# Altium PCB DCI_MB1137 - saved.PcbDoc
Units mil, origin at the board's own origin, x right, y up, seen from the top; angles counter-clockwise.
Board outline 6060 x 4005 mil, 6 copper layers (Top Layer, Top Internal, VDD, GND, Bottom Internal, Bottom Layer), stack 25.868 mil thick; 154 components, 203 nets, 605 pads, 40 vias.
Unrouted connection lines stored in the file: 364.
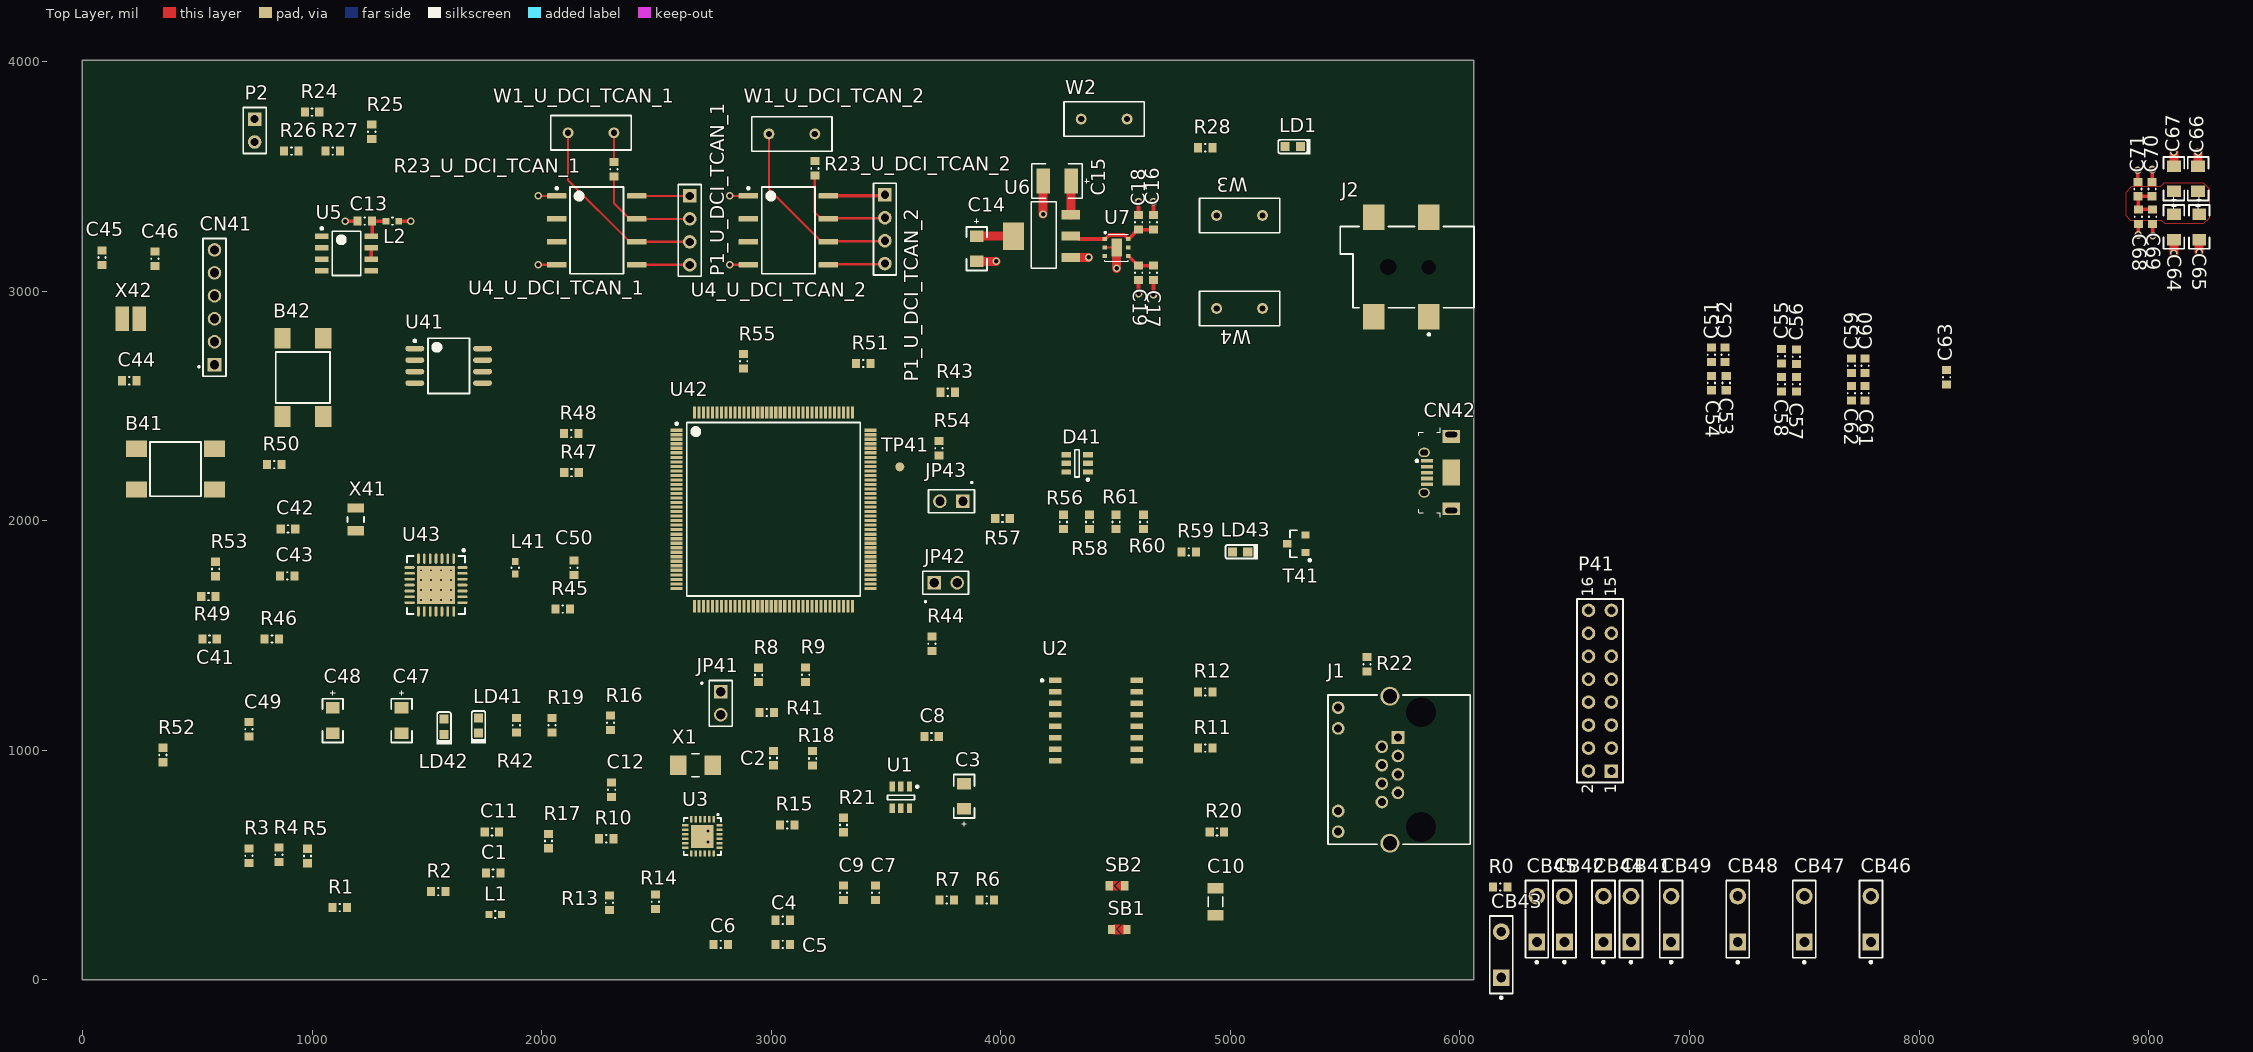
[diagram p0: Top Layer view]
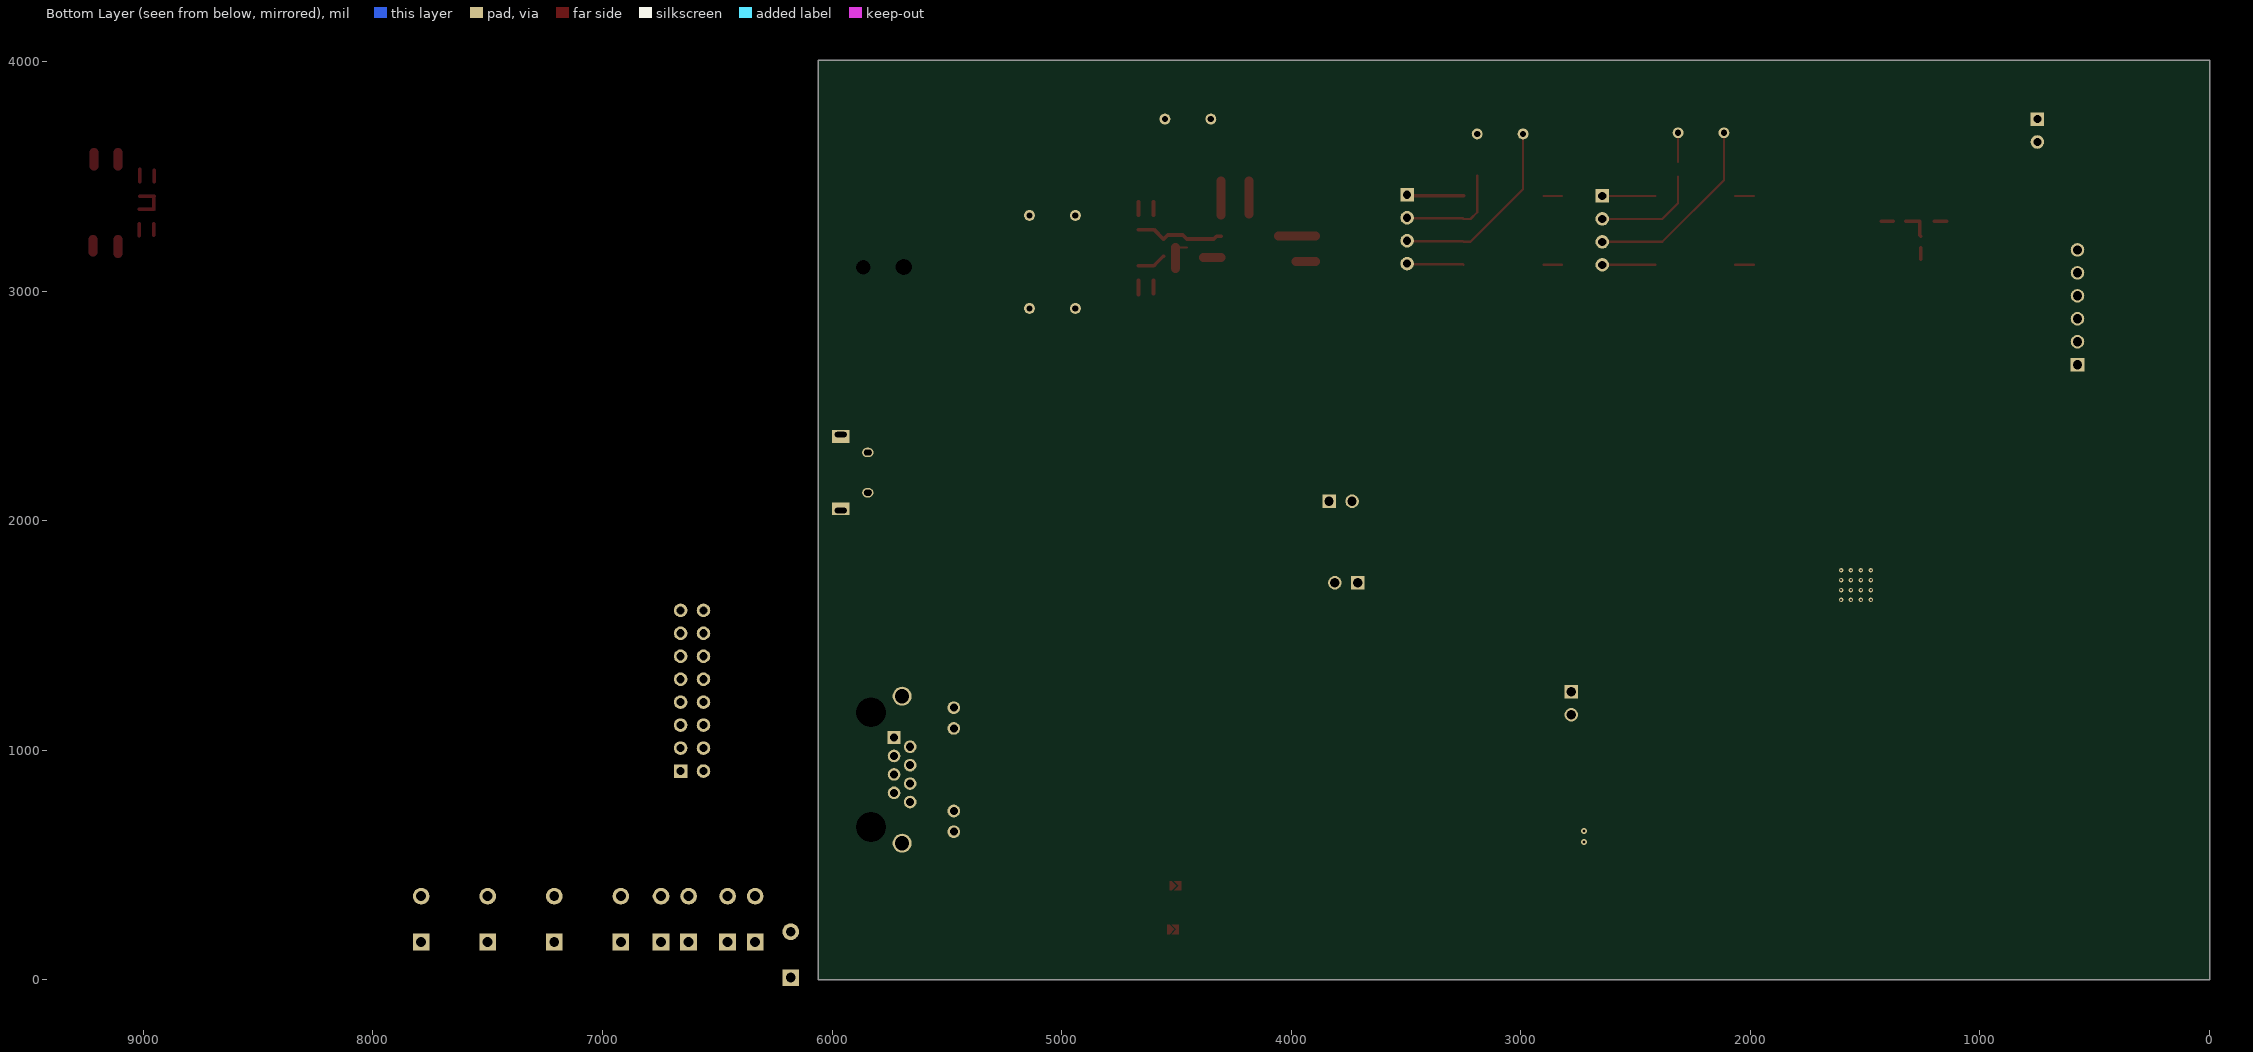
[diagram p1: Bottom Layer view, seen from below]
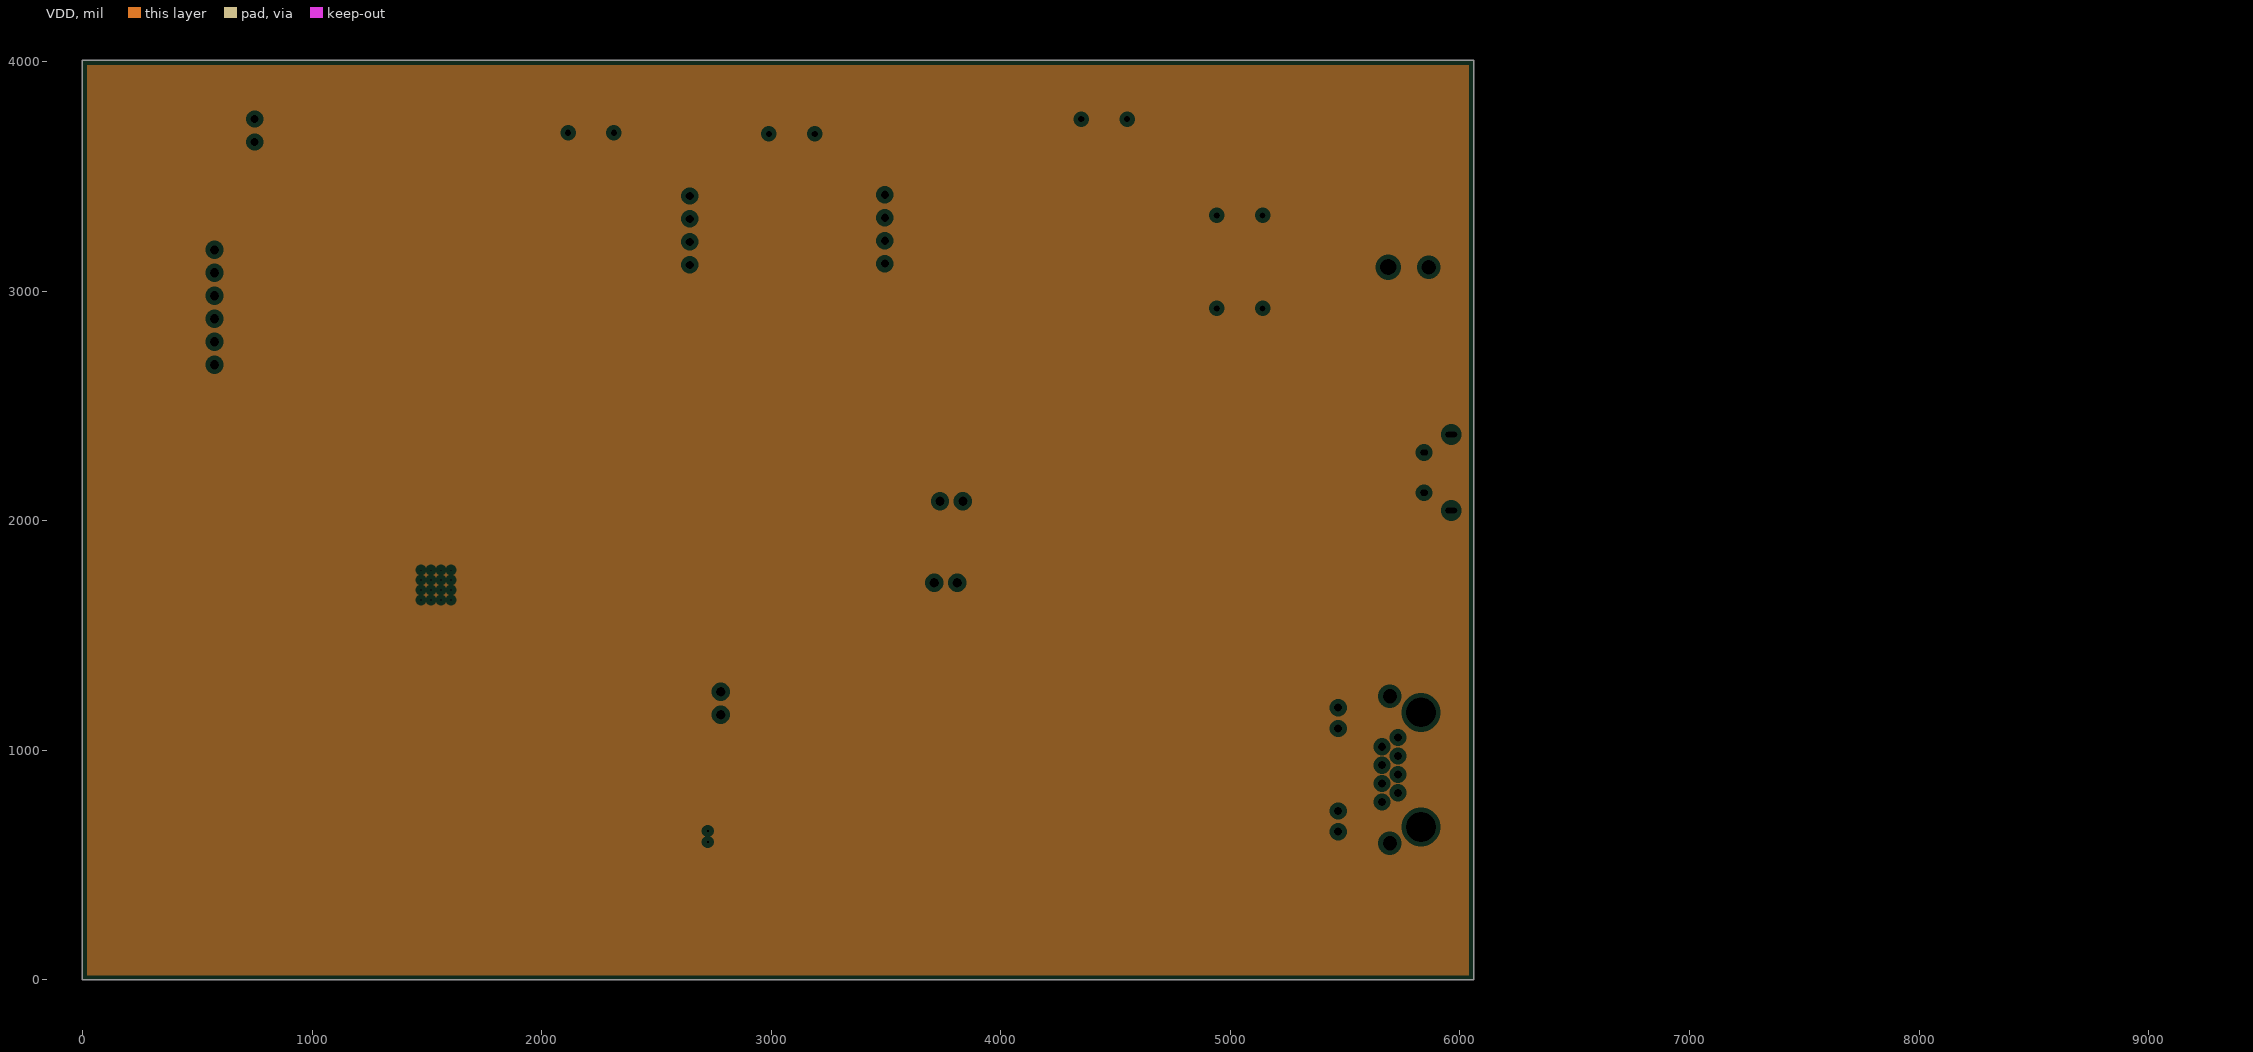
[diagram p2: VDD, clearances drawn from the general rule]
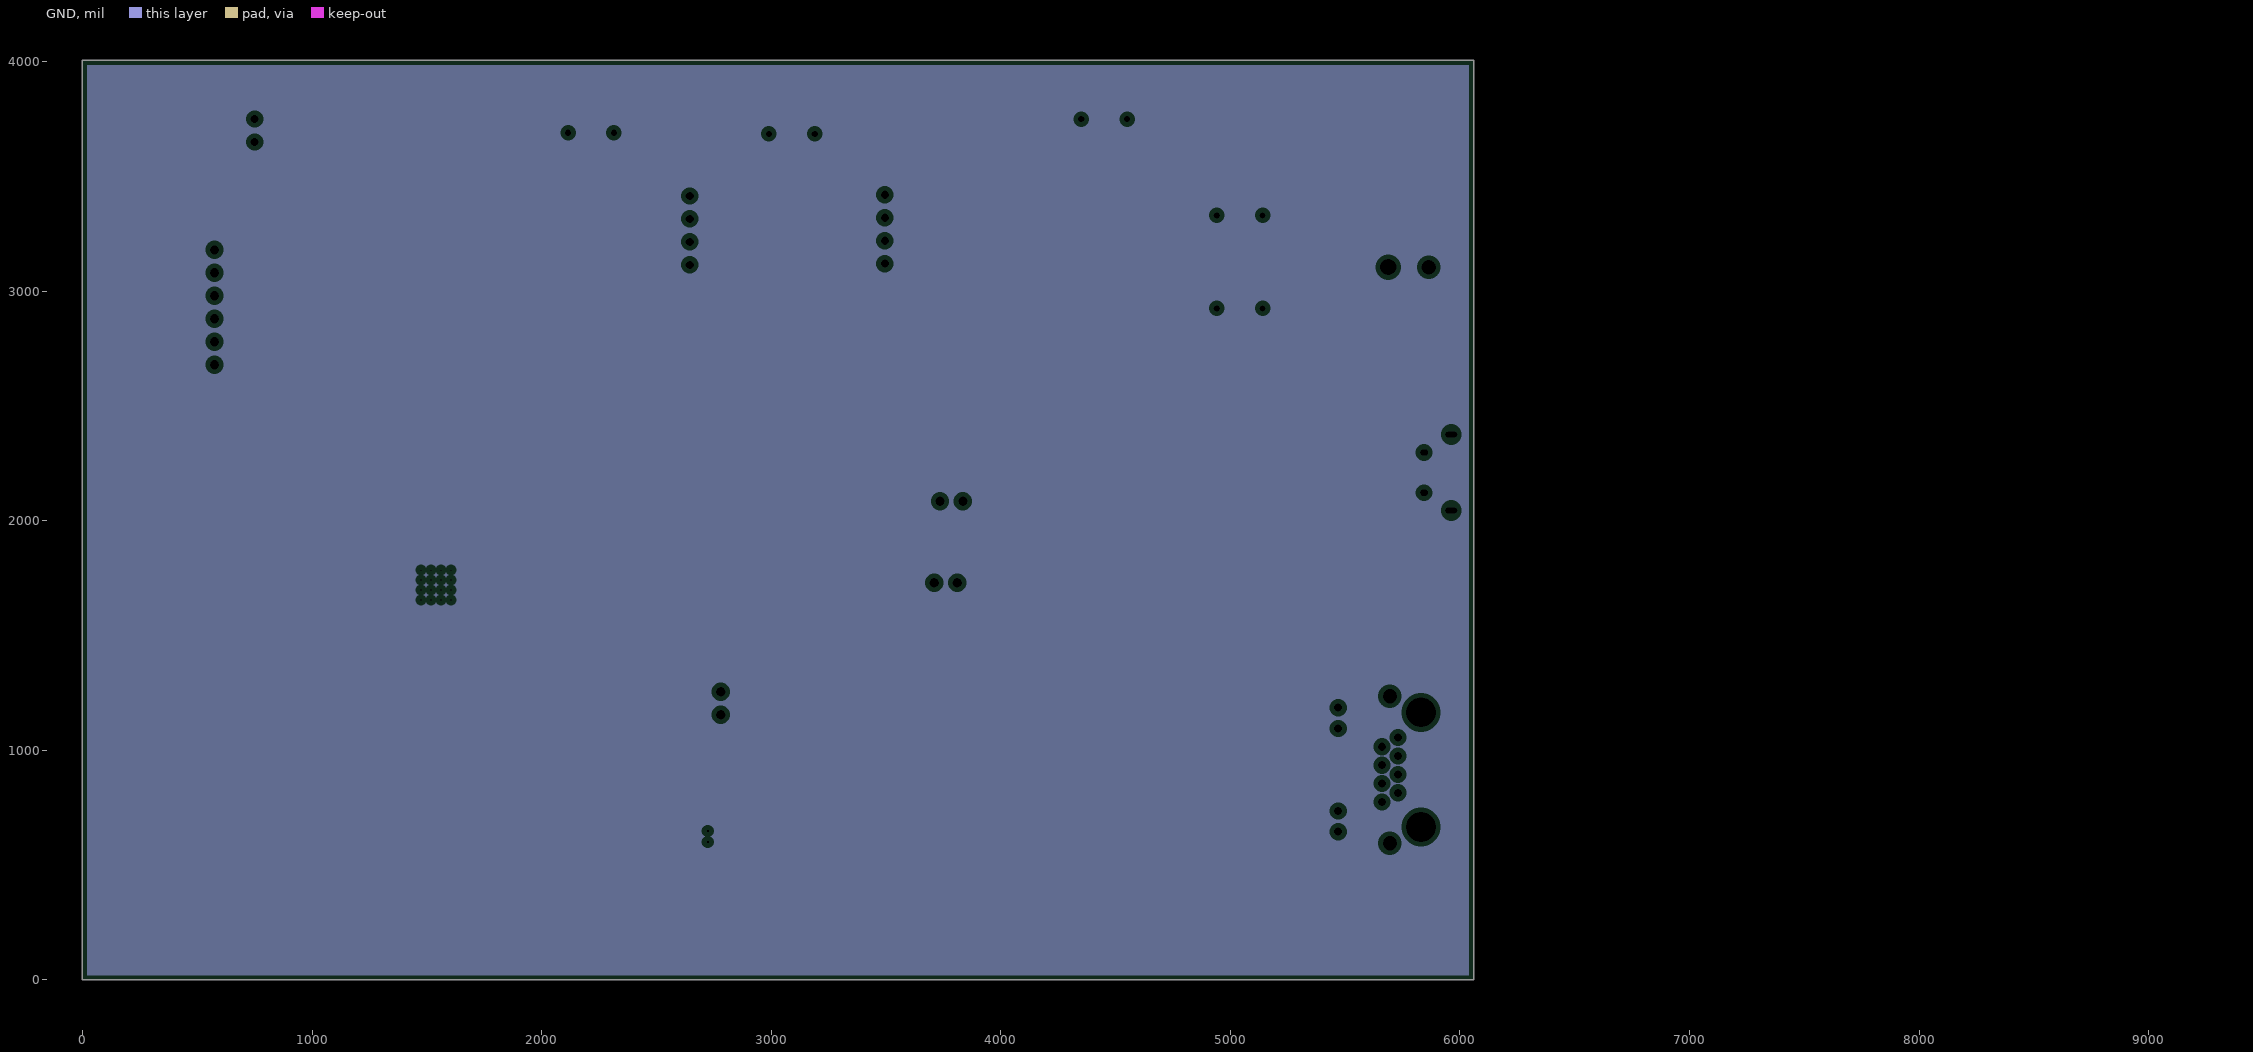
[diagram p3: GND, clearances drawn from the general rule]

## Layer stack, top to bottom
Top Solder: solder mask 1, SM-001, Dk 4
Top Layer: signal copper 1.378
Dielectric 1: prepreg 2, PP-001, Dk 3.9
Dielectric 2: prepreg 2, PP-001, Dk 3.9
Top Internal: signal copper 1.378
Dielectric 6: prepreg 2.8, PP-006, Dk 4.1
VDD: plane copper 1.378
Dielectric 3: core 4, Core-009, Dk 4.5
GND: plane copper 1.378
Dielectric 7: prepreg 2.8, PP-006, Dk 4.1
Bottom Internal: signal copper 1.378
Dielectric 4: prepreg 2, PP-001, Dk 3.9
Dielectric 5: prepreg 2, PP-001, Dk 3.9
Bottom Layer: signal copper 1.378
Bottom Solder: solder mask 1, SM-001, Dk 4

## Board outline
0,0 6060,0 6060,4005 0,4005

## Design rules (kind name [scope] priority, off if disabled: settings)
Clearance [All] p1: gap=7.87 ignorepadtopadclearanceinfootprint=FALSE
DiffPairsRouting [All] p1: maxlimit=10 minlimit=9.84 mostfreqgap=9.84 toplayer_maxgap=9.84 toplayer_minwidth=9.84 toplayer_maxwidth=9.84 toplayer_prefwidth=9.84 midlayer1_minwidth=9.84 midlayer1_maxwidth=9.84 midlayer1_prefwidth=9.84 midlayer2_minwidth=9.84 midlayer2_maxwidth=9.84 midlayer2_prefwidth=9.84 bottomlayer_maxgap=9.84 bottomlayer_minwidth=9.84 bottomlayer_maxwidth=9.84 bottomlayer_prefwidth=9.84 maxuncoupledlength=500
MatchedLengths "Schematic Matched Net Lengths_3" [InNet('RD_P')] p1: tolerance=100 checknetsindiffpair=TRUE checkdiffpairvsdiffpair=FALSE checkxsignals=FALSE checkothers=FALSE
MatchedLengths "Schematic Matched Net Lengths_2" [InNet('TD_P')] p2: tolerance=100 checknetsindiffpair=TRUE checkdiffpairvsdiffpair=FALSE checkxsignals=FALSE checkothers=FALSE
MatchedLengths "Schematic Matched Net Lengths_1" [InNet('RD_N')] p3: tolerance=100 checknetsindiffpair=TRUE checkdiffpairvsdiffpair=FALSE checkxsignals=FALSE checkothers=FALSE
MatchedLengths "Schematic Matched Net Lengths" [InNet('TD_N')] p4: tolerance=100 checknetsindiffpair=TRUE checkdiffpairvsdiffpair=FALSE checkxsignals=FALSE checkothers=FALSE
PlaneClearance [All] p1: clearance=20
PlaneConnect [All] p1: planeconnectstyle=Relief reliefexpansion=20 reliefentries=4 reliefconductorwidth=10 reliefairgap=10
PolygonConnect [All] p1: connectstyle=Relief reliefconductorwidth=10 reliefentries=4 polygonreliefangle="90 Angle" airgapwidth=10
RoomDefinition U_USB [InComponentClass('U_USB')] p1: confinementstyle=ConfineIn formatcopy=TRUE lockcomponents=FALSE outline -3420,-4435 -1420,-4435 -1420,-3435 -3420,-3435
RoomDefinition U_MCU_144 [InComponentClass('U_MCU_144')] p2: confinementstyle=ConfineIn formatcopy=TRUE lockcomponents=FALSE outline -3420,-4435 -1420,-4435 -1420,-3435 -3420,-3435
RoomDefinition U_Ethernet [InComponentClass('U_Ethernet')] p3: confinementstyle=ConfineIn formatcopy=TRUE lockcomponents=FALSE outline -3420,-4435 -1420,-4435 -1420,-3435 -3420,-3435
RoomDefinition U_DCI_TCAN_2 [InComponentClass('U_DCI_TCAN_2')] p4: confinementstyle=ConfineIn formatcopy=TRUE lockcomponents=FALSE outline -3420,-4435 -1420,-4435 -1420,-3435 -3420,-3435
RoomDefinition U_DCI_TCAN_1 [InComponentClass('U_DCI_TCAN_1')] p5: confinementstyle=ConfineIn formatcopy=TRUE lockcomponents=FALSE outline -3420,-4435 -1420,-4435 -1420,-3435 -3420,-3435
RoomDefinition U_DCI_MCU_Power [InComponentClass('U_DCI_MCU_Power')] p6: confinementstyle=ConfineIn formatcopy=TRUE lockcomponents=FALSE outline -3420,-4435 -1420,-4435 -1420,-3435 -3420,-3435
RoomDefinition U_DC1_ADC_Conditioning [InComponentClass('U_DC1_ADC_Conditioning')] p7: confinementstyle=ConfineIn formatcopy=TRUE lockcomponents=FALSE outline -3420,-4435 -1420,-4435 -1420,-3435 -3420,-3435
RoutingVias [All] p1: holewidth=19.68 width=33.07 viastyle="Through Hole" minholewidth=11.81 minwidth=25.2 maxholewidth=39.37 maxwidth=52.76
SolderMaskExpansion [All] p1: expansion=4 istentingtop=FALSE
Width Width_PWR [InNetClass('All Nets')] p1: maxlimit=39.37 minlimit=7.87 preferedwidth=15.75
Width [All] p2: maxlimit=23.62 minlimit=7.87 preferedwidth=15.75
Width Width_differential_pair [All] p3: maxlimit=35.43 minlimit=7.87 preferedwidth=23.62
27 further rules are at their usual default settings.

## Classes and differential pairs
net class PWR: +5V +12V GND PWR_JACK VDD
channel class DCI_TCAN: U_DCI_TCAN_1 U_DCI_TCAN_2
component class U_DCI_TCAN_2: P1_U_DCI_TCAN_2 R23_U_DCI_TCAN_2 U4_U_DCI_TCAN_2 W1_U_DCI_TCAN_2
component class U_DCI_TCAN_1: P1_U_DCI_TCAN_1 R23_U_DCI_TCAN_1 U4_U_DCI_TCAN_1 W1_U_DCI_TCAN_1
component class U_DCI_MCU_Power: C14 C15 C16 C17 C18 C19 J2 LD1 R28 U6 U7 W2 W3 W4
component class U_USB: C64 C65 C66 C67 C68 C69 C70 C71 CN42 D41 LD43 R56 R57 R58 R59 R60 R61 T41
component class U_MCU_144: B41 B42 C41 C42 C43 C44 C45 C46 C47 C48 C49 C50 C51 C52 C53 C54 C55 C56 C57 C58 C59 C60 C61 C62 C63 CB41 CB42 CB43 CB44 CB45 CB46 CB47 CB48 CB49 CN41 JP41 JP42 JP43 L41 LD41 LD42 P41 R0 R41 R42 R43 R44 R45 R46 R47 R48 R49 R50 R51 R52 R53 R54 R55 TP41 U41 U42 U43 X41 X42
component class U_Ethernet: C1 C2 C3 C4 C5 C6 C7 C8 C9 C10 C11 C12 J1 L1 R1 R2 R3 R4 R5 R6 R7 R8 R9 R10 R11 R12 R13 R14 R15 R16 R17 R18 R19 R20 R21 R22 SB1 SB2 U1 U2 U3 X1
component class U_DC1_ADC_Conditioning: C13 L2 P2 R24 R25 R26 R27 U5
differential pair CAN_U_DCI_TCAN_2: +CAN_U_DCI_TCAN_2_P -CAN_U_DCI_TCAN_2_N
differential pair CAN_U_DCI_TCAN_1: +CAN_U_DCI_TCAN_1_P -CAN_U_DCI_TCAN_1_N
differential pair USB_D: +USB_D_P -USB_D_N
differential pair TD: +TD_P -TD_N
differential pair RD: +RD_P -RD_N

## Components (designator, comment, footprint, x,y, rotation, side; value= is the part's Value field where it differs from the comment)
B41 "USER (Blue)" PB-6X6mm-Blue 405,2225 r180 top
B42 "TD-0341 [RESET/Black]" PB-6X6mm-Black 960,2625 r90 top
C1 "100nF" 0603C 1788.5,465 r0 top
C2 "30pF" 0603C 3010,966.5 r90 top value=100nF
C3 "10uF" TAN-A 3840,800 r270 top
C4 "470pF" 0603C 3050,260 r0 top value=100nF
C5 "1uF_X5R" 0603C 3050,155 r180 top value=1µF
C6 "100nF" 0603C 2780,155 r0 top
C7 "100nF" 0603C 3455,380 r270 top
C8 "100nF" 0603C 3698.5,1060 r0 top
C9 "100nF" 0603C 3315,380 r270 top
C10 "TC1206KKX7RDBB102" 1206C 4935,340.94 r270 top value=100nF
C11 "100nF" 0603C 1783.5,645 r0 top
C12 "30pF" 0603C 2305,828.5 r270 top value=100nF
C13 "100nF" 0603C 1230,3305 r180 top value=10nF
C14 "10uF" TAN-A 3895,3185 r90 top
C15 "10uF(25V)" TAN-B 4245,3480 r0 top value=10uF
C16 "1uF_X5R" 0603C 4665,3300 r90 top value=1µF
C17 "1uF_X5R" 0603C 4665,3080 r270 top value=1µF
C18 "100nF" 0603C 4600,3300 r270 top
C19 "100nF" 0603C 4600,3080 r90 top
C41 "[N/A]" 0603C 553.5,1485 r180 top value=100pF
C42 "2pF" 0603C 895,1965 r180 top
C43 "2pF" 0603C 891.5,1760 r180 top
C44 "4.3pF[N/A]" 0603C 203.5,2610 r0 top
C45 "4.3pF[N/A]" 0603C 85,3146.5 r90 top
C46 "100nF" 0603C 315,3141.5 r270 top value=100pF
C47 "2.2uF_X7R" TAN-A 1390,1130 r90 top value=2.2uF
C48 "2.2uF_X7R" TAN-A 1090,1130 r90 top value=2.2uF
C49 "1uF_X5R" 0603C 725,1091.5 r90 top value=1µF
C50 "100nF" 0603C 2140,1795 r90 top value=10nF
C51 "100nF" 0603C 7095,2723.5 r90 top value=10nF
C52 "100nF" 0603C 7155,2723.5 r90 top value=10nF
C53 "100nF" 0603C 7160,2600 r270 top value=10nF
C54 "100nF" 0603C 7095,2600 r270 top value=10nF
C55 "100nF" 0603C 7400,2716.5 r90 top value=10nF
C56 "100nF" 0603C 7465,2715 r90 top value=10nF
C57 "100nF" 0603C 7465,2595 r270 top value=10nF
C58 "100nF" 0603C 7400,2595 r270 top value=10nF
C59 "100nF" 0603C 7705,2675 r90 top value=10nF
C60 "100nF" 0603C 7765,2675 r90 top value=10nF
C61 "100nF" 0603C 7765,2555 r270 top value=10nF
C62 "100nF" 0603C 7705,2555 r270 top value=10nF
C63 "4.7uF_X5R_0603" 0603C 8120,2625 r90 top value=1µF
C64 "4.7uF" TAN-A 9110,3280 r90 top value=47uF
C65 "4.7uF" TAN-A 9220,3280 r90 top value=47uF
C66 "4.7uF" TAN-A 9215,3490 r270 top value=47uF
C67 "4.7uF" TAN-A 9110,3490 r270 top value=47uF
C68 "100nF" 0603C 8955,3325 r270 top value=10nF
C69 "100nF" 0603C 9017.24,3325 r270 top value=10nF
C70 "100nF" 0603C 9015,3445 r90 top value=10nF
C71 "100nF" 0603C 8952.76,3445 r90 top value=10nF
CB41 "Circuit Breaker" SPST-2 6745,265 r90 top
CB42 "Circuit Breaker" SPST-2 6455,265 r90 top
CB43 "Circuit Breaker" SPST-2 6180,110 r90 top
CB44 "Circuit Breaker" SPST-2 6625,265 r90 top
CB45 "Circuit Breaker" SPST-2 6335,265 r90 top
CB46 "Circuit Breaker" SPST-2 7790,265 r90 top
CB47 "Circuit Breaker" SPST-2 7500,265 r90 top
CB48 "Circuit Breaker" SPST-2 7210,265 r90 top
CB49 "Circuit Breaker" SPST-2 6920,265 r90 top
CN41 "SWD_Header" HDR_1x6_2R54_V_M 575,2680 r90 top
CN42 "475900001" MOLEX_47590001 5856.93,2210 r90 top
D41 "ESDA6V1BC6" SOT23-6L 4332.24,2250 r180 top
J1 "RJHSE-5381" AMPH-RJHSE-5381_V 5694.96,915.79 r90 top
J2 "Power_Connector" CUI-PJ-002AH-4_V 5770,3105 r180 top
JP41 "" HDR_1x2_2R54_V_M_S 2780,1255 r270 top
JP42 "" HDR_1x2_2R54_V_M_S 3710,1730 r0 top
JP43 "" HDR_1x2_2R54_V_M_S 3835,2085 r180 top
L1 "BEAD" 0603L 1797.5,285 r0 top value=100uH
L2 "BEAD" 0603L 1350,3305 r0 top value=100uH
L41 "BEAD" 0603L 1885,1795 r90 top value=100uH
LD1 "Green" 0603D-G 5271.53,3630 r180 top
LD41 "Blue" 0603D-B 1725,1108.47 r90 top
LD42 "Red" 0603D-R 1575,1103.47 r90 top
LD43 "Green" 0603D-G 5042.24,1865 r180 top
P1_U_DCI_TCAN_1 "CAN_Header" HDR1X4 2645,3415 r270 top (schematic designator P1)
P1_U_DCI_TCAN_2 "CAN_Header" HDR1X4 3495,3420 r270 top (schematic designator P1)
P2 "ADC_Header" HDR1X2 750,3750 r270 top
P41 "Header 8X2" HDR2X8 6660,910 r90 top
R0 "0" 0603R 6175,405 r0 top value=1K
R1 "50" 0603R 1120,315 r0 top
R2 "50" 0603R 1550,385 r0 top
R3 "10K" 0603R 725,541.5 r270 top
R4 "10K" 0603R 855,545 r270 top
R5 "10K" 0603R 980,540 r270 top
R6 "50" 0603R 3939,348.5 r180 top
R7 "50" 0603R 3764,348.5 r180 top
R8 "33" 0603R 2945,1328.5 r90 top
R9 "33" 0603R 3150,1330 r90 top
R10 "10K" 0603R 2281.5,615 r180 top
R11 "75" 0603R 4890,1010 r180 top value=50
R12 "75" 0603R 4890,1255 r180 top value=50
R13 "75" 0603R 2295,336.5 r90 top value=50
R14 "75" 0603R 2495,340 r90 top value=50
R15 "12K1" 0603R 3070,675 r0 top
R16 "33" 0603R 2300,1120 r90 top
R17 "1K5" 0603R 2030,605 r90 top
R18 "10K" 0603R 3180,965 r270 top
R19 "33" 0603R 2045,1110 r90 top
R20 "270" 0603R 4941.5,645 r180 top value=10K
R21 "10K" 0603R 3315,675 r270 top
R22 "270" 0603R 5595,1375 r270 top value=10K
R23_U_DCI_TCAN_1 "120" 0603R 2315,3531.5 r270 top value=1K (schematic designator R23)
R23_U_DCI_TCAN_2 "120" 0603R 3190,3535 r270 top value=1K (schematic designator R23)
R24 "22K" 0603R 1000,3780 r180 top value=1K
R25 "10k" 0603R 1260,3695 r90 top value=1K
R26 "22k" 0603R 910,3610 r180 top value=1K
R27 "10k" 0603R 1090,3610 r180 top value=1K
R28 "1K" 0603R 4890,3625 r0 top value=10K
R41 "100K" 0603R 2980,1165 r0 top value=1K
R42 "680" 0603R 1890,1110 r90 top value=1K
R43 "10K" 0603R 3768.5,2560 r180 top
R44 "1K" 0603R 3700,1465 r270 top
R45 "330" 0603R 2091.5,1615 r180 top value=1K
R46 "100" 0603R 825,1485 r180 top value=1K
R47 "0" 0603R 2130,2210 r0 top value=1K
R48 "0" 0603R 2128.5,2380 r180 top value=1K
R49 "220K" 0603R 548.5,1670 r0 top value=1K
R50 "10k" 0603R 835,2245 r0 top value=10K
R51 "10k" 0603R 3401.5,2685 r0 top value=10K
R52 "10k" 0603R 350,980 r90 top value=10K
R53 "0" 0603R 580,1790 r90 top value=10K
R54 "22" 0603R 3730,2316.5 r90 top value=10K
R55 "22" 0603R 2880,2695 r270 top value=10K
R56 "430K" 0603R 4272.24,1995 r270 top value=1K
R57 "1K5" 0603R 4007.24,2010 r180 top value=10K
R58 "620K" 0603R 4387.24,1995 r90 top value=1K
R59 "330" 0603R 4818.74,1865 r180 top value=1K
R60 "47K" 0603R 4622.24,1995 r270 top value=1K
R61 "22K" 0603R 4502.24,1995 r270 top value=1K
SB1 "Open" SB_0603 4516.25,220 r0 top
SB2 "Open" SB_0603 4506.25,410 r0 top
T41 "9013" SOT-23 5287.24,1900 r90 top
TP41 "USB_SOF" TP 3560,2235 r90 top
U1 "USBLC6-4SC6" SOT23-6L 3565,795 r270 top
U2 "KMS-1102NL" Transformer 4415,1130 r270 top
U3 "LAN8742A-CZ-TR" QFN24_0R5_4X4 2700,625 r270 top
U4_U_DCI_TCAN_1 "ISO1050DUBR" DUB0008A_L 2240,3265 r0 top (schematic designator U4)
U4_U_DCI_TCAN_2 "ISO1050DUBR" DUB0008A_L 3075,3265 r0 top (schematic designator U4)
U5 "MC33077DR2G" ONSC-SOIC-8-751-07_V 1150,3165 r0 top
U6 "LD1117S50TR" SOT-223 4180,3240 r180 top
U7 "LD39050PU33R" DFN6_0R95_3x3_TP 4505,3190 r270 top
U41 "M25P16-VMW6G" MICT-MW-8_N 1595,2675 r0 top
U42 "MCU_LQFP144" TSQFP50P2200X2200X160-144N 3010,2050 r0 top
U43 "MCP23S17T-E/ML" QFN-ML28_M 1540,1720 r270 top
W1_U_DCI_TCAN_1 "Jumper" RAD-0.2 2215,3690 r180 top (schematic designator W1)
W1_U_DCI_TCAN_2 "Jumper" RAD-0.2 3090,3685 r180 top (schematic designator W1)
W2 "Jumper_USB" RAD-0.2 4450,3750 r0 top
W3 "Jumper_12V" RAD-0.2 5040,3330 r180 top
W4 "Jumper_5V" RAD-0.2 5040,2925 r180 top
X1 "X53T-C20SSA-25.000MHz" XTAL_2SM_5R0X3R2 2670,935 r0 top
X41 "NX3215SA-32.768KHZ" XTAL_2SM_3R2X1R5 1190,2005.79 r270 top
X42 "NX3225GD-8.000M-EXS00A" OSC_2SM_3R2x2R5 210,2880 r180 top

## Footprints (in the part's own frame and the unit in brackets; to place one, negate y for a bottom-side part, rotate by r counter-clockwise, add the part's x,y. Pads: shape width x height; smd on the part's side, far side on the other; paste and mask are expansions set on the pad)
0603C [mm] "Chip Capacitor, Body 1.6x0.8mm, Height 1.0mm, IPC Medium Density"
  rect 0.9x1 smd: 1(-0.8,0) 2(0.8,0)
  silkscreen extent -0.05,-0.4 0.05,0.4, body extent -0.87,-0.48 0.88,0.47, height 1
0603D-B [mm] "LED, SMT, Body 1.6 x 0.8 mm, 0.25mm Thickness"
  rect 1x1 smd paste+0 mask+0: 1(0.85,0) 2(-0.85,0)
  silkscreen extent -1.99,-0.85 1.6,0.85, body extent -0.8,-0.4 0.8,0.4, height 0.25
0603D-G [mm] "LED, SMT, Body 1.6 x 0.8 mm, 0.25mm Thickness"
  rect 1x1 smd paste+0 mask+0: 1(0.85,0) 2(-0.85,0)
  silkscreen extent -1.98,-0.85 1.6,0.85, body extent -0.8,-0.4 0.8,0.4, height 0.25
0603D-R [mm] "LED, SMT, Body 1.6 x 0.8 mm, 0.25mm Thickness"
  rect 1x1 smd paste+0 mask+0: 1(0.85,0) 2(-0.85,0)
  silkscreen extent -1.98,-0.86 1.6,0.84, body extent -0.8,-0.4 0.8,0.4, height 0.25
0603L [mil] "Bead 0603L"
  rect 30x30 smd: 1(27.5,0) 2(-27.5,0)
  silkscreen extent -2,-16 2,16, body extent -34,-19 34,19, height 24
0603R [mm] "Chip Resistor, Body 1.6x0.8mm, IPC Medium Density"
  rect 0.9x1 smd: 1(-0.8,0) 2(0.8,0)
  silkscreen extent -0.05,-0.4 0.05,0.4, body extent -0.85,-0.47 0.85,0.47, height 0.6
1206C [mm] "Chip Capacitor, Body 3.2x1.6mm, Height 1mm, IPC Medium Density"
  rect 1.15x1.8 smd: 1(-1.5,0) 2(1.5,0)
  silkscreen extent -0.55,-0.8 0.55,0.8, body extent -1.7,-0.9 1.7,0.9, height 1
AMPH-RJHSE-5381_V [mm] "THD, 12-Leads, Body 16.51x15.75mm"
  rect 1.4x1.4 hole 0.89 mask+0.102: 1(3.56,-0.89)
  round 1.4 hole 0.89 mask+0.102: 2(2.54,0.89) 3(1.52,-0.89) 4(0.5,0.89) 5(-0.52,-0.89) 6(-1.54,0.89) 7(-2.56,-0.89) 8(-3.58,0.89) 9(-6.86,5.72) 10(-4.57,5.72) 11(4.57,5.72) 12(6.86,5.72)
  round 0 hole 3.3 unplated mask+0.102: MH1(-6.35,-3.43) MH2(6.35,-3.43)
  round 2.1 hole 1.57: S1(-8.13,0) S2(8.13,0)
  silkscreen extent -8.25,-8.89 8.25,6.86, body extent -8.42,-9.14 8.42,7.06, height 14.89
CUI-PJ-002AH-4_V [mm] "SMD, 4-Leads, Body 14.8x9 mm, Pitch 6.1mm"
  rect 2.4x2.8 smd: 1(-2.4,5.5) 1(3.7,5.5) 2(-2.4,-5.5) 3(3.7,-5.5)
  round 0 hole 1.6: MH1(-2.4,0)
  round 0 hole 1.8: MH2(2.1,0)
  silkscreen extent -7.4,-4.5 7.4,7.57, body extent -7.4,-6.3 7.4,6.3, height 11.2
DFN6_0R95_3x3_TP [mm] "500 mA low quiescent current and low noise voltage regulator"
  rect 2x1.2 smd: 0(0,0)
  rect 0.45x0.5 smd: 1(-0.95,-1.3) 2(0,-1.3) 3(0.95,-1.3) 4(0.95,1.3) 5(0,1.3) 6(-0.95,1.3)
  silkscreen extent -1.71,-1.33 1.5,1.3, body extent -1.5,-1.5 1.5,1.5, height 1
DUB0008A_L [mm] "SOP, 8-Leads, Body 6.7x9.6mm, Pitch 2.54mm, IPC High Density"
  rrect17% 2.15x0.6 smd: 1(-4.425,3.81) 2(-4.425,1.27) 3(-4.425,-1.27) 4(-4.425,-3.81) 5(4.425,-3.81) 6(4.425,-1.27) 7(4.425,1.27) 8(4.425,3.81)
  silkscreen extent -4.55,-4.8 2.95,4.8, body extent -5.24,-4.75 5.24,4.75, height 4.85
HDR1X2 [mm] "Connector; Header; 2 Position"
  rect 1.5x1.5 hole 0.9: 1(0,0)
  round 1.5 hole 0.9: 2(2.54,0)
  silkscreen extent -1.27,-1.27 3.81,1.27
HDR1X4 [mm] "Connector; Header; 4 Position"
  rect 1.5x1.5 hole 0.9: 1(0,0)
  round 1.5 hole 0.9: 2(2.54,0) 3(5.08,0) 4(7.62,0)
  silkscreen extent -1.27,-1.27 8.89,1.27
HDR2X8 [mm] "Connector; Header; 8x2 Position"
  rect 1.5x1.5 hole 0.9: 1(0,0)
  round 1.5 hole 0.9: 2(0,2.54) 3(2.54,0) 4(2.54,2.54) 5(5.08,0) 6(5.08,2.54) 7(7.62,0) 8(7.62,2.54) 9(10.16,0) 10(10.16,2.54) 11(12.7,0) 12(12.7,2.54) 13(15.24,0) 14(15.24,2.54) 15(17.78,0) 16(17.78,2.54)
  silkscreen extent -1.27,-1.27 19.05,3.81
HDR_1x2_2R54_V_M_S [mm] "Male Header, Pitch 2.54mm, 4x1 Position, Mated Height 6mm, Tail Length 3mm"
  rect 1.5x1.5 hole 1.02: 1(0,0)
  round 1.5 hole 1.02: 2(2.54,0)
  silkscreen extent -1.27,-2.14 3.81,1.27, body extent -1.27,-1.27 3.81,1.27, height 9
HDR_1x6_2R54_V_M [mm] "Male Header, Pitch 2.54mm, 6x1 Position, Mated Height 6mm, Tail Length 3mm"
  rect 1.5x1.5 hole 1.02: 1(0,0)
  round 1.5 hole 1.02: 2(2.54,0) 3(5.08,0) 4(7.62,0) 5(10.16,0) 6(12.7,0)
  silkscreen extent -1.27,-1.27 13.97,1.79, body extent -1.27,-1.27 13.97,1.27, height 9
MICT-MW-8_N [mm] "SOIC, 8-Leads, Body 6.2x6.1mm, Pitch 1.27mm, IPC Medium Density"
  oval 2.1x0.6 smd: 1(-3.75,1.905) 2(-3.75,0.635) 3(-3.75,-0.635) 4(-3.75,-1.905) 5(3.75,-1.905) 6(3.75,-0.635) 7(3.75,0.635) 8(3.75,1.905)
  silkscreen extent -3.87,-3.05 2.3,3.05, body extent -3.1,-3.05 3.1,3.05
MOLEX_47590001 [mm] "USB Micro-B Connector"
  rect 0.4x1.35 smd: 1(1.3,0) 2(0.65,0) 3(0,0) 4(-0.65,0) 5(-1.3,0)
  oval 1.05x1.25 hole 0.65 slot 0.85 at 90 deg: 6(-2.225,0.325) 10(2.225,0.325)
  rect 1.4x1.9 hole 0.6 slot 1.3 at 90 deg copper offset 0.2,0: 7(-4.2,-2.675)
  rect 2.9x1.9 smd: 8(0,-2.675)
  rect 1.4x1.9 hole 0.6 slot 1.3 at 90 deg copper offset -0.2,0: 9(4.2,-2.675)
  silkscreen extent -4.95,-1.46 4.95,1.25, body extent -4.4,-5.29 4.4,0.44, height 2.71
ONSC-SOIC-8-751-07_V [mm] "SOIC, 8-Leads, Body 4.9x3.9mm, Pitch 1.27mm"
  rect 1.52x0.6 smd: 1(-2.74,1.905) 2(-2.74,0.635) 3(-2.74,-0.635) 4(-2.74,-1.905) 5(2.74,-1.905) 6(2.74,-0.635) 7(2.74,0.635) 8(2.74,1.905)
  silkscreen extent -2.86,-2.45 1.58,2.88, body extent -1.95,-2.45 1.95,2.45, height 1.75
OSC_2SM_3R2x2R5 [mm] "Crystal 8M Hz 3.2x2.5mm SMD"
  rect 1.5x2.7 smd: 1(-0.95,0) 2(0.95,0)
  body extent -1.6,-1.25 1.6,1.25, height 1
PB-6X6mm-Black [mm] "Surface Mounting Type Tact Switch, 4-Leads, Body 6x6mm, Height 4.5mm Black"
  rect 2.3x1.8 smd: 1(4.325,2.25) 2(4.325,-2.25) 3(-4.325,-2.25) 4(-4.325,2.25)
  silkscreen extent -2.83,-3 2.81,3, body extent -3,-3 3,3, height 10.5
PB-6X6mm-Blue [mm] "Surface Mounting Type Tact Switch, 4-Leads, Body 6x6mm, Height 4.5mm,Blue"
  rect 2.3x1.8 smd: 1(4.325,2.25) 2(4.325,-2.25) 3(-4.325,-2.25) 4(-4.325,2.25)
  silkscreen extent -2.83,-3 2.81,3, body extent -3,-3 3,3, height 10.5
QFN24_0R5_4X4 [mm] "SQFN 24 Pins, Pitch 0.5mm, 4mmx4mm"
  rect 0.69x0.28 smd: 1(-1.9,1.25) 2(-1.9,0.75) 3(-1.9,0.25) 4(-1.9,-0.25) 5(-1.9,-0.75) 6(-1.9,-1.25) 13(1.9,-1.25) 14(1.9,-0.75) 15(1.9,-0.25) 16(1.9,0.25) 17(1.9,0.75) 18(1.9,1.25)
  rect 0.28x0.69 smd: 7(-1.25,-1.9) 8(-0.75,-1.9) 9(-0.25,-1.9) 10(0.25,-1.9) 11(0.75,-1.9) 12(1.25,-1.9) 19(1.25,1.9) 20(0.75,1.9) 21(0.25,1.9) 22(-0.25,1.9) 23(-0.75,1.9) 24(-1.25,1.9)
  rect 2.5x2.5 smd: 25(0,0)
  silkscreen extent -2.46,-2.05 2.05,2.05, body extent -2.05,-2.05 2.05,2.05, height 1
QFN-ML28_M [mm] "QFN, 28-Leads, Body 6x6mm, Pitch 0.65mm, Thermal Pad 4.2x4.2mm, IPC Low Density"
  oval 1.15x0.3 smd: 1(-2.925,1.95) 2(-2.925,1.3) 3(-2.925,0.65) 4(-2.925,0) 5(-2.925,-0.65) 6(-2.925,-1.3) 7(-2.925,-1.95) 15(2.925,-1.95) 16(2.925,-1.3) 17(2.925,-0.65) 18(2.925,0) 19(2.925,0.65) 20(2.925,1.3) 21(2.925,1.95)
  oval 0.3x1.15 smd: 8(-1.95,-2.925) 9(-1.3,-2.925) 10(-0.65,-2.925) 11(0,-2.925) 12(0.65,-2.925) 13(1.3,-2.925) 14(1.95,-2.925) 22(1.95,2.925) 23(1.3,2.925) 24(0.65,2.925) 25(0,2.925) 26(-0.65,2.925) 27(-1.3,2.925) 28(-1.95,2.925)
  rect 4.2x4.2 smd: 29(0,0)
  silkscreen extent -3.97,-3.2 3.2,3.2, body extent -3.05,-3.05 3.05,3.05, height 1
RAD-0.2 [mm] "Radial Cap, Thru-Hole; 2 Leads; 0.2 in Pin Spacing"
  round 1.2 hole 0.7: 1(-2.54,0) 2(2.54,0)
  silkscreen extent -4.44,-1.91 4.44,1.91
SB_0603 [mil] "Jumper"
  rect 32x40 smd: 1(33.75,0) 2(-33.75,0)
  Top Layer region: 23.75,20 13.75,20 -6.25,0 13.75,-20 23.75,-20
  Top Layer region: -26.25,0 -16.25,0 3.75,20 -26.25,20
  Top Layer region: -26.25,0 -16.25,0 3.75,-20 -26.25,-20
SOT23-6L [mm]
  rect 1.1x0.6 smd: 1(-1.2,0.95) 2(-1.2,0) 3(-1.2,-0.95) 4(1.2,-0.95) 5(1.2,0) 6(1.2,0.95)
  silkscreen extent -1.32,-1.5 0.25,1.92, body extent -0.86,-1.51 0.87,1.52, height 1.25
SOT-23 [mm]
  rect 0.8x0.9 smd: 1(-0.98,-1) 2(0.98,-1) 3(0,1)
  silkscreen extent -1.95,-1.62 1.5,0.7, body extent -1.52,-0.7 1.52,0.7, height 1.11
SOT-223 [mil] "Adjustable and fixed low drop positive voltage regulator"
  rect 80x40 smd: 1(-125,93) 2(-125,0) 3(-125,-93)
  rect 90x120 smd: 4(125,0)
  silkscreen extent -62,-149 48,141, body extent -84,-132 62,132, height 71
SPST-2 [mm] "Switch; 2 Leads"
  rect 1.85x1.85 hole 1.1: 1(-2.54,0)
  round 1.85 hole 1.1: 2(2.54,0)
  silkscreen extent -4.89,-1.27 4.28,1.27
TAN-A [mil] "TAN Capacitor"
  rect 50x60 smd: 1(55,0) 2(-55,0)
  silkscreen extent -95,-45 130,45, body extent -47,-35 47,35, height 39
TAN-B [mm] "Tan Capacitor"
  rect 1.5x2.8 smd: 1(1.55,0) 2(-1.55,0)
  silkscreen extent -2.79,-1.9 3.56,1.91, body extent -1.76,-1.54 1.7,1.54, height 1
TP [mm] "Testpoint, Surface Mounting, Circular, Pad Diameter 1mm"
  round 1 smd: 1(0,0)
Transformer [mm]
  rect 0.64x1.4 smd: 1(-4.445,-4.51) 2(-3.175,-4.51) 3(-1.905,-4.51) 4(-0.635,-4.51) 5(0.635,-4.51) 6(1.905,-4.51) 7(3.175,-4.51) 8(4.445,-4.51) 9(4.445,4.51) 10(3.175,4.51) 11(1.905,4.51) 12(0.635,4.51) 13(-0.635,4.51) 14(-1.905,4.51) 15(-3.175,4.51) 16(-4.445,4.51)
  silkscreen extent -4.57,-6.09 -4.32,-5.84, body extent -6.4,-3 6.4,3, height 6
TSQFP50P2200X2200X160-144N [mm] "TSQFP, 144-Leads, Body 20.00x20.00mm, Pitch 0.50mm, IPC Medium Density"
  rect 1.35x0.35 smd: 1(-10.725,8.75) 2(-10.725,8.25) 3(-10.725,7.75) 4(-10.725,7.25) 5(-10.725,6.75) 6(-10.725,6.25) 7(-10.725,5.75) 8(-10.725,5.25) 9(-10.725,4.75) 10(-10.725,4.25) 11(-10.725,3.75) 12(-10.725,3.25) 13(-10.725,2.75) 14(-10.725,2.25) 15(-10.725,1.75) 16(-10.725,1.25) 17(-10.725,0.75) 18(-10.725,0.25) 19(-10.725,-0.25) 20(-10.725,-0.75) 21(-10.725,-1.25) 22(-10.725,-1.75) 23(-10.725,-2.25) 24(-10.725,-2.75) 25(-10.725,-3.25) 26(-10.725,-3.75) 27(-10.725,-4.25) 28(-10.725,-4.75) 29(-10.725,-5.25) 30(-10.725,-5.75) 31(-10.725,-6.25) 32(-10.725,-6.75) 33(-10.725,-7.25) 34(-10.725,-7.75) 35(-10.725,-8.25) 36(-10.725,-8.75) 73(10.725,-8.75) 74(10.725,-8.25) 75(10.725,-7.75) 76(10.725,-7.25) 77(10.725,-6.75) 78(10.725,-6.25) 79(10.725,-5.75) 80(10.725,-5.25) 81(10.725,-4.75) 82(10.725,-4.25) 83(10.725,-3.75) 84(10.725,-3.25) 85(10.725,-2.75) 86(10.725,-2.25) 87(10.725,-1.75) 88(10.725,-1.25) 89(10.725,-0.75) 90(10.725,-0.25) 91(10.725,0.25) 92(10.725,0.75) 93(10.725,1.25) 94(10.725,1.75) 95(10.725,2.25) 96(10.725,2.75) 97(10.725,3.25) 98(10.725,3.75) 99(10.725,4.25) 100(10.725,4.75) 101(10.725,5.25) 102(10.725,5.75) 103(10.725,6.25) 104(10.725,6.75) 105(10.725,7.25) 106(10.725,7.75) 107(10.725,8.25) 108(10.725,8.75)
  rect 0.35x1.35 smd: 37(-8.75,-10.725) 38(-8.25,-10.725) 39(-7.75,-10.725) 40(-7.25,-10.725) 41(-6.75,-10.725) 42(-6.25,-10.725) 43(-5.75,-10.725) 44(-5.25,-10.725) 45(-4.75,-10.725) 46(-4.25,-10.725) 47(-3.75,-10.725) 48(-3.25,-10.725) 49(-2.75,-10.725) 50(-2.25,-10.725) 51(-1.75,-10.725) 52(-1.25,-10.725) 53(-0.75,-10.725) 54(-0.25,-10.725) 55(0.25,-10.725) 56(0.75,-10.725) 57(1.25,-10.725) 58(1.75,-10.725) 59(2.25,-10.725) 60(2.75,-10.725) 61(3.25,-10.725) 62(3.75,-10.725) 63(4.25,-10.725) 64(4.75,-10.725) 65(5.25,-10.725) 66(5.75,-10.725) 67(6.25,-10.725) 68(6.75,-10.725) 69(7.25,-10.725) 70(7.75,-10.725) 71(8.25,-10.725) 72(8.75,-10.725) 109(8.75,10.725) 110(8.25,10.725) 111(7.75,10.725) 112(7.25,10.725) 113(6.75,10.725) 114(6.25,10.725) 115(5.75,10.725) 116(5.25,10.725) 117(4.75,10.725) 118(4.25,10.725) 119(3.75,10.725) 120(3.25,10.725) 121(2.75,10.725) 122(2.25,10.725) 123(1.75,10.725) 124(1.25,10.725) 125(0.75,10.725) 126(0.25,10.725) 127(-0.25,10.725) 128(-0.75,10.725) 129(-1.25,10.725) 130(-1.75,10.725) 131(-2.25,10.725) 132(-2.75,10.725) 133(-3.25,10.725) 134(-3.75,10.725) 135(-4.25,10.725) 136(-4.75,10.725) 137(-5.25,10.725) 138(-5.75,10.725) 139(-6.25,10.725) 140(-6.75,10.725) 141(-7.25,10.725) 142(-7.75,10.725) 143(-8.25,10.725) 144(-8.75,10.725)
  silkscreen extent -10.85,-9.6 9.6,9.6, body extent -11,-11 11,11, height 1.6
XTAL_2SM_3R2X1R5 [mm] "CRYSTAL 32.768KHZ 6PF SMD 2 pads"
  rect 1x1.8 smd: 1(-1.25,0) 2(1.25,0)
  silkscreen extent -0.28,-0.91 0.28,0.91, body extent -1.63,-0.75 1.58,0.75, height 0.89
XTAL_2SM_5R0X3R2 [mm] "CRYSTAL 25M Hz  30F SMD 2 pads"
  rect 1.8x2.2 smd: 1(-1.9,0) 2(1.9,0)
  silkscreen extent -0.4,-1.27 0.4,1.27, body extent -2.5,-1.6 2.5,1.6, height 1.3

## Part data
B41 B42: library part "SW PUSHBUTTON", "SE PUSHBUTTON"
C1 C2 C4 C6 C7 C8 C9 C11 C12 C18 C19: library part Capacitor_ST, "Capacitor 0402 / 0603 / 0805", Revision="July-2002: Re-released for DXP Platform."
C3: library part Cap_10uF_POL_10%_TANA, "Polarized Capacitor,10uF,10V,10%,typeA,VISHAY", Manuf_1=VISHAY, Manuf_Part_1=293D106X9010A2TE3, ECCN_US/EU=n/a, Revision="July-2002: Re-released for DXP Platform."
C5 C16 C17 C49: library part "CAP SMD 0603  X5R 1µF 25V 10%", "0603  X5R 1µF", Rated voltage=25V, Temperature Max=+125°C, Temperature Min=-55°C, Tolerance=10%, Order code Farnell=1288202RL, Technology=X5R
C10: library part Capacitor_ST, "Capacitor 0402 / 0603 / 0805/ 1206", Revision="July-2002: Re-released for DXP Platform."
C13 C50 C51 C52 C53 C54 C55 C56 C57 C58 C59 C60 C61 C62 C68 C69 C70 C71: library part Cap, "Capacitor", Published=8-Jun-2000, Publisher="Altium Limited", Revision="July-2002: Re-released for DXP Platform."
C14 C15 C64 C65 C66 C67: library part "Cap Pol1", "Polarized Capacitor (Radial)", Published=8-Jun-2000, Publisher="Altium Limited", Revision="July-2002: Re-released for DXP Platform."
C41 C42 C43 C44 C45 C46: library part CAP, "Capacitor"
  C41 C46: Published=8-Jun-2000, Publisher="Altium Limited", Revision="July-2002: Re-released for DXP Platform."
C47 C48: library part Cap_2.2uF_X7R_10%_0805, "Capacitor,2.2uF,16V, X7R,10%,0805,YAGEO", Manuf_1=YAGEO, Manuf_Part_1=CC0805KKX7R7BB225, Order=CC0805KKX7R7BB225, Revision="July-2002: Re-released for DXP Platform."
C63: library part "CAP SMD 0603  X5R 1µF 25V 10%", "0603  X5R 4.7uF", Rated voltage=25V, Temperature Max=+125°C, Temperature Min=-55°C, Tolerance=10%, Order code Farnell=1288202RL, Technology=X5R
CN41: library part "Header 6X1", "Header, 6-Pin, Single row", LatestRevisionDate=17-Jul-2002, LatestRevisionNote="Re-released for DXP Platform.", Publisher="Altium Limited"
D41: "4-line ESD protection", Manuf_1=STM, Manuf_Part_1=ESDA5V3L, Distrib=ST, ECCN_US/EU=EAR99/NEC, Order=ESDA5V3L, Ordered by=STM, Provided=ST, Ref St=9179034
J1: library part CMP-2000-06980-1, "High Speed RJ45, Modular Jack, 8 Position, 8 Contacts, Shielded, with LEDs, -55 to 85 degC,12-Pin THD, RoHS, Tray", LED Color=Yellow-Green, Manufacturer=Amphenol, Operating Temperature=-55°C~85°C, Package Description="12-Pin Through Hole Device, Body 16.51 x 15.75 mm", Ratings=-, Standard Package=120, 3D Model=RJHSE538x.stpRJHSE538x.igs, Catalog Drawings=RJ45SeriesRightAngle, Category=Connectors,Interconnects, Connector Type=Jack, Contact Finish=Gold, Contact Finish Thickness=50µin(1.27µm), Contact Material=PhosphorBronze, Datasheet URL=https://datasheet.ciiva.com/16481/rjhse538x-16481714.pdf, Datasheet Version="Rev. K, 04/2014", Family=ModularConnectors-Jacks, Featured Product=ModularJacksProductSolutions, Features=BoardLock, Housing Material=Thermoplastic, Ingress Protection=-, Manufacturer URL=http://www.amphenol.com/, Mounting Technology=ThroughHole, Mounting Type=ThroughHole, Number of Ports=1, Number of Positions/Contacts=8p8c(RJ45,Ethernet), Number of Rows=1, Online Catalog=RJHSESeries, Orientation=90°Angle(Right), Other Names=RJHSE5381, Package Reference=RJHSE-5381, Packaging=Tray, PCN Design/Specification=MultipleSeriesCopper29/Jan/2009RJHSEShieldMaterial30/Jun/2015, Series=RJHSE, Shielding=Shielded,EMIFinger, Tab Direction=Up, Termination=Solder
J2: library part CMP-2000-06896-1, "DC Power Jack, Right Angle, -25 to 85 degC, 4-Pin 14.8 x 9 x 11 mm SMD, RoHS, Tape and Reel", Current Rating=5A, Flammability Rating=UL94V-0, Insulation Resistance=100MOhms, Manufacturer=CUIInc., Operating Temperature Range=-25Cto+85C, Package Description="4-Pin Surface Mount Device, Body 14.8 x 9 mm, Pitch 6.1 mm", Package Reference=PJ-002AH, Voltage Rating=24V, Brand=CUI, Connector Type=DCPowerJack, Contact Gender=Male, Contact Material=Brass, Contact Plating=Nickel, Datasheet URL=http://www.cui.com/product/resource/pj-002ah-smt.pdf, Datasheet Version="Rev. 1.03, 11/2012", Factory Pack Quantity=350, Housing Material=Polyamide(PA), Inside Contact Diameter=2mm, Manufacturer URL=http://www.cui.com/, Mounting Angle=Right, Mounting Style=SMD/SMT, Mounting Technology=SurfaceMount, Outside Contact Diameter=6.5mm, Packaging=Reel, PartNumber=PJ-002AH, Product=Jacks, Product Category=DCPowerConnectors, RoHS=True, Termination Style=SMD/SMT
JP41 JP42 JP43: library part JP2
L1 L2 L41: library part Inductor, "Inductor", Published=8-Jun-2000, Publisher="Altium Limited", Revision="July-2002: Re-released for DXP Platform."
LD1 LD41 LD42 LD43: library part LED2, "Typical RED, GREEN, YELLOW, AMBER GaAs LED", Published=8-Jun-2000, Publisher="Altium Limited", Revision="July-2002: Re-released for DXP Platform."
P1_U_DCI_TCAN_1 P1_U_DCI_TCAN_2: library part "Header 4", "Header, 4-Pin", LatestRevisionDate=17-Jul-2002, LatestRevisionNote="Re-released for DXP Platform.", Publisher="Altium Limited"
P2: library part "Header 2", "Header, 2-Pin", LatestRevisionDate=17-Jul-2002, LatestRevisionNote="Re-released for DXP Platform.", Publisher="Altium Limited"
P41: "Header, 8-Pin, Dual row", LatestRevisionDate=17-Jul-2002, LatestRevisionNote="Re-released for DXP Platform.", Publisher="Altium Limited"
R0 R41 R49 R56 R58 R59 R60 R61: library part res1, "Resistor", Published=8-Jun-2000, Publisher="Altium Limited", Revision="July-2002: Re-released for DXP Platform."
R1 R2 R6 R7: library part Res_50_1%_0603, "Resistor,50,0603,1%,YAGEO", Manuf_1=YAGEO, Manuf_Part_1=RC0402FR-0750RL, Distrib=FARNELL, ECCN_US/EU=n/a
R3 R4 R5 R10 R18 R20 R21 R22 R28 R43 R50 R51 R52 R53 R54 R55 R57: library part Resistor_ST, "Resistor 0402 / 0603 / 0805"
R8 R9 R16 R19: library part Res_33_1%_0402, "Resistor,33,0402,1%,YAGEO", Manuf_1=YAGEO, Manuf_Part_1=RC0402FR-0733RL, Distrib=FARNELL, ECCN_US/EU=n/a
R11 R12 R13 R14: library part Res_75_1%_0603, "Resistor,75,0603,1%,YAGEO", Manuf_1=YAGEO, Manuf_Part_1=RC0402FR-0750RL, Distrib=FARNELL, ECCN_US/EU=n/a
R15: library part Res_12K1_1%_0603, "Resistor,12K1,0603,1%,VISHAY", Manuf_1=VISHAY, Manuf_Part_1="MCT 0603-50 1% P5 12K1", Distrib=FARNELL, ECCN_US/EU=n/a, Order=2325243
R17: library part Res_1K5_1%_0402, "Resistor,1K5,0402,1%,YAGEO", Manuf_1=YAGEO, Manuf_Part_1=RC0402FR-071K5L, Distrib=FARNELL, ECCN_US/EU=n/a, Order=RC0402FR-071K5L
R23_U_DCI_TCAN_1 R23_U_DCI_TCAN_2 R24 R25 R26 R27 R42 R44 R45 R46 R47 R48: library part Res1, "Resistor", Published=8-Jun-2000, Publisher="Altium Limited", Revision="July-2002: Re-released for DXP Platform."
  R23_U_DCI_TCAN_1 R23_U_DCI_TCAN_2 R24 R25 R26 R27: Ordered by=Subcon
SB1 SB2: library part "Circuit Breaker", "Circuit Breaker", Published=24-Mar-1999, Publisher="Altium Limited", Revision="July-2002: Re-released for DXP Platform."
T41: library part NPN, "NPN Bipolar Transistor", Code - JEDEC=TO-226-AA, Published=8-Jun-2000, Publisher="Altium Limited", Revision="July-2002: Re-released for DXP Platform."
TP41: library part TP
U3: "LAN8742A-CZ-TR - Small Footprint RMII 10/100 Ethernet, Transceiver with HP Auto-MDIX and flexPWR Technology SQFN-24", Manuf_1=MICROCHIP, Distrib=MICROCHIP, Manuf_Part_1=LAN8742A-CZ-TR, Order=LAN8742A-CZ-TR
U4_U_DCI_TCAN_1 U4_U_DCI_TCAN_2: library part CMP-0315-00093-2, "Isolated CAN Transceiver, -55 to 105 degC, 8-pin SOP (DUB), Green (RoHS & no Sb/Br)", Drivers Per Package=1, Manufacturer="Texas Instruments", Rating=Catalog, ComponentLink1Description=Datasheet, ComponentLink1URL=http://www.ti.com/general/docs/lit/getliterature.tsp?genericPartNumber=ISO1050&fileType=pdf, ComponentLink2Description="Package Specification", ComponentLink2URL=http://www.ti.com/litv/pdf/mpds247b, DatasheetVersion=SLLS983E, Eco-Plan="Green (RoHS & no Sb/Br)", Isolated=Yes, Mounting Technology="Surface Mount", PackageDescription="8-Pin Small Outline Package 2.54 mm Pitch", PackageReference=DUB0008A, PackageVersion="revC, May-2006", PartNumber=ISO1050DUBR, SubFamily=CAN
U5: library part CMP-1310-00366-1, "Low Noise Dual Operational Amplifier, 5 to 36 V, -40 to 85 degC, 8-Pin SOIC, Pb-Free, Tape and Reel", Manufacturer="On Semiconductor", ComponentLink1Description="Manufacturer URL", ComponentLink1URL=http://www.onsemi.com/, ComponentLink2Description=Datasheet, ComponentLink2URL=http://www.onsemi.cn/pub_link/Collateral/MC33077-D.PDF, ComponentLink3Description="Package Specification", ComponentLink3URL=http://www.onsemi.com/pub_link/Collateral/751-07.PDF, DatasheetVersion="Rev. 5", GBW Typ (MHz)=37, Mounting Technology="Surface Mount", PackageDescription="8-Pin Small Outline Integrated Circuit, Body 4.9 x 3.9 mm, Pitch 1.27 mm", PackageReference=SOIC-8-751-07, PackageVersion="Rev. AK, 02/2011", Packing="Tape and Reel", PartNumber=MC33077DR2G, RoHS=TRUE, SR Typ (V/uS)=11, VCC Max (V)=36, VCC Min (V)=5
U6: library part LD1117
U7: library part LD39050P
U41: library part CMP-0357-00145-1, "16 Mb (x1) Serial NOR Flash Memory, 75 MHz, 2.7 to 3.6 V, 8-pin SO8 Wide (MW), Tube", Manufacturer=Micron, Package="SO8 WideÂ", Voltage=2.7V-3.6VÂ, Applications=EmbeddedÂ, ComponentLink1Description="Manufacturer URL", ComponentLink1URL=http://www.micron.com/, ComponentLink2Description=Datasheet, ComponentLink2URL=http://www.micron.com/~/media/Documents/Products/Data%20Sheet/NOR%20Flash/Serial%20NOR/M25P/M25P16.pdf, ComponentLink3Description="Package Specification", ComponentLink3URL=http://www.micron.com/~/media/Documents/Products/Data%20Sheet/NOR%20Flash/Serial%20NOR/M25P/M25P16.pdf, DatasheetVersion="Rev. Y", Density=16MbÂ, Mounting Technology="Surface Mount", PackageDescription="8-Pin SO Wide, 5.62 X 6.05 mm, Pitch 1.27 mm", PackageReference=MICT-MW-8, PackageVersion="Rev 8", Part Family=M25PÂ, Part Status=ProductionÂ, PartNumber=M25P16-VMW6G, RoHS=YesÂ, Speed="75 MHzÂ", Type="Data StorageÂ", Width=x1Â
U43: library part CMP-0186-00026-2, "16-Bit I/O Expander with Serial Interface, 28-Pin QFN, Extended Temperature, Tape and Reel", Code_JEDEC=MO-220, ComponentLink1Description="Manufacturer URL", ComponentLink1URL=http://www.microchip.com/, ComponentLink2Description=Datasheet, ComponentLink2URL=http://ww1.microchip.com/downloads/en/DeviceDoc/21952b.pdf, ComponentLink3Description="Package Specification", ComponentLink3URL=http://www.microchip.com/stellent/groups/techpub_sg/documents/packagingspec/en012702.pdf, DatasheetVersion="revB, Feb-2007", PackageDescription="28-Lead Plastic Quad Flat, No Lead Package (ML) - 6x6 mm Body [QFN] with 0.55 mm Contact Length", PackageReference=QFN-ML28, PackageVersion="revBB, Aug-2009", RevisionNote="URLs added. Sch pin type corrected."
W1_U_DCI_TCAN_1 W1_U_DCI_TCAN_2: "Jumper Wire", LatestRevisionDate=17-Jul-2002, LatestRevisionNote="Re-released for DXP Platform.", PackageDescription="Radial Cap, Thru-Hole; 2 Leads; 0.2 in Pin Spacing", PackageReference=RAD-0.2, Published=24-Mar-1999, Publisher="Altium Limited"
W2 W3 W4: library part Jumper, "Jumper Wire", LatestRevisionDate=17-Jul-2002, LatestRevisionNote="Re-released for DXP Platform.", PackageDescription="Radial Cap, Thru-Hole; 2 Leads; 0.2 in Pin Spacing", PackageReference=RAD-0.2, Published=24-Mar-1999, Publisher="Altium Limited"
X1: library part XTAL_5032, "Crystal Oscillator", LatestRevisionDate=17-Jul-2002, LatestRevisionNote="Re-released for DXP Platform.", PackageReference=R38, Published=8-Jun-2000, Publisher="Altium Limited"
X41: library part CRYSTAL_32K, "Crystal"
X42: library part XTAL, "Crystal Oscillator", LatestRevisionDate=17-Jul-2002, LatestRevisionNote="Re-released for DXP Platform.", PackageReference=R38, Published=8-Jun-2000, Publisher="Altium Limited"
CB41 CB42 CB43 CB44 CB45 CB46 CB47 CB48 CB49: LatestRevisionDate=17-Jul-2002, LatestRevisionNote="Re-released for DXP Platform.", PackageDescription="Switch; 2 Leads", PackageReference=SPST-2, Published=24-Mar-1999, Publisher="Altium Limited"

## Via types
v1: diameter 33.07, hole 19.68, Top Layer to Top Internal, 22 vias
v2: diameter 19.68, hole 7.87, Top Layer to Bottom Layer, 16 vias
v3: diameter 25.98, hole 12.99, Top Layer to Bottom Layer, 2 vias

## Nets (pads, with @x,y where several pads share a name; then routed paths per layer and width w, separated by ;. In a path a pad name is that pad's centre, name@x,y a point inside that pad or via, vN(x,y) a via of type N, cw(c..) or ccw(c..) an arc to the next point about the centre after c; other vN are vias at no path point)
+5V: C16.1 C18.2 R28.2 U6.2 U7.1 U7.6 W2.2 W4.2 | length 397.1
  Top Layer w15.75: U6.2 4325,3240 4337.6,3227.4 U7.1 4454.8,3227.4 4472.52,3245.12 4537.48,3245.12 4555.2,3227.4 U7.6 4557.17,3227.4 4558.15,3228.39 4558.15,3228.62 4598.03,3268.5 C18.2 C16.1
+12V: C15.1 U6.3 W3.2 | length 147.8
  Top Layer w39.37: U6.3 4305.71,3333 4306.02,3333.31 C15.1
AGND: C13.2 C50.2 CB45.1 R0.2 R25.1 R27.1 U5.4 U42.31 | length 53.5
  Top Layer w15.75: v1(1145,3305) C13.2
AVDD: C50.1 L41.2 U42.32 U42.33
AVDD_COND: C13.1 L2.2 U5.8 | length 127.5
  Top Layer w15.75: U5.8 1261.5,3243.62 C13.1 L2.2
CAN_U_DCI_TCAN_1_N: P1_U_DCI_TCAN_1.3 U4_U_DCI_TCAN_1.6 W1_U_DCI_TCAN_1.2 | length 847.6
  Top Layer w9.84: W1_U_DCI_TCAN_1.2 2115,3483.7 2383.7,3215 U4_U_DCI_TCAN_1.6 P1_U_DCI_TCAN_1.3
CAN_U_DCI_TCAN_1_P: P1_U_DCI_TCAN_1.2 R23_U_DCI_TCAN_1.2 U4_U_DCI_TCAN_1.7 | length 474.8
  Top Layer w9.84: R23_U_DCI_TCAN_1.2 2315,3383.7 2383.7,3315 U4_U_DCI_TCAN_1.7 P1_U_DCI_TCAN_1.2
CAN_U_DCI_TCAN_2_N: P1_U_DCI_TCAN_2.3 U4_U_DCI_TCAN_2.6 W1_U_DCI_TCAN_2.2 | length 843.1
  Top Layer w9.84: W1_U_DCI_TCAN_2.2 2990,3443.7 3218.7,3215 U4_U_DCI_TCAN_2.6 3251.71,3217.5 3492.5,3217.5 P1_U_DCI_TCAN_2.3
CAN_U_DCI_TCAN_2_P: P1_U_DCI_TCAN_2.2 R23_U_DCI_TCAN_2.2 U4_U_DCI_TCAN_2.7 | length 478.8
  Top Layer w9.84: R23_U_DCI_TCAN_2.2 3190,3343.7 3218.7,3315 U4_U_DCI_TCAN_2.7 3251.71,3317.5 3492.5,3317.5 P1_U_DCI_TCAN_2.2
GND: B42.1 B42.4 C1.1 C2.2 C3.2 C4.1 C5.2 C6.1 C7.1 C8.1 C9.1 C11.1 C12.2 C14.2 C15.2 C16.2 C17.2 C18.1 C19.1 C42.2 C43.2 C44.2 C45.2 C46.1 C47.2 C48.2 C49.2 C51.2 C52.2 C53.2 C54.2 C55.2 C56.2 C57.2 C58.2 C59.2 C60.2 C61.2 C62.2 C63.2 C64.2 C65.2 C66.2 C67.2 C68.2 C69.2 C70.2 C71.2 CB42.2 CB46.2 CB48.2 CB49.2 CN41.6 CN42.5 CN42.6 CN42.7 CN42.8 CN42.9 CN42.10 D41.2 D41.5 J2.2 J2.3 LD1.2 LD41.2 LD42.2 R0.1 R10.2 R15.2 R20.2 R21.2 R22.2 R49.2 R58.2 R61.1 SB1.2 SB2.2 T41.2 U1.2 U3.25 U4_U_DCI_TCAN_1.4 U4_U_DCI_TCAN_2.4 U6.1 U7.0 U7.2 U41.4 U42.16 U42.51 U42.61 U42.83 U42.94 U42.107 U42.120 U42.130 U42.138 U43.6 U43.29 | length 1287.8
  Top Layer w9.84: v1(1985,3115) U4_U_DCI_TCAN_1.4 ; v1(2820,3115) U4_U_DCI_TCAN_2.4 ; U7.2 U7.0
  Top Layer w15.75: v1(4600,2990) C19.1 ; C18.1 v1(4600,3390) ; v1(4665,2985) C17.2 ; C16.2 v1(4665,3390) ; C71.2 v1(8952.76,3527.24) ; v1(8955,3245) C68.2 ; C70.2 v1(9015,3530) ; v1(9017.24,3242.24) C69.2
  Top Layer w39.37: C14.2 v1(3980,3130) ; v1(4183.98,3336.02) C15.2 ; U6.1 v1(4383,3147) ; v1(4505,3100) U7.0 ; v1(9110,3165) C64.2 ; C67.2 v1(9110,3605) ; C66.2 v1(9215,3605) ; v1(9220,3170) C65.2
  other v2: 1475.04,1655.04 1518.35,1655.04 1561.65,1655.04 1604.96,1655.04 1475.04,1698.35 1518.35,1698.35 1561.65,1698.35 1604.96,1698.35 1475.04,1741.65 1518.35,1741.65 1561.65,1741.65 1604.96,1741.65 1475.04,1784.96 1518.35,1784.96 1561.65,1784.96 1604.96,1784.96
  other v3: 2723.62,601.38 2723.62,648.62
LED(GREEN)_A: J1.11 R21.1 U3.2
LED(GREEN)_K: J1.12 R22.1
LED(YELLOW)_A: J1.10 U3.3
LED(YELLOW)_K: J1.9 R20.1
NC: J1.2 J1.4 J1.6 J1.8 R13.2 R14.2
NetB41_1: B41.1 B41.4 C41.2 R45.1 R49.1
NetC1_2: C1.2 C3.1 C7.2 C8.2 C9.2 C11.2 L1.1 R1.2 R2.2 R6.2 R7.2 U1.5 U2.2 U2.7 U3.1 U3.19
NetC2_1: C2.1 R18.2 U3.4 X1.2
NetC4_2: C4.2 C5.1 U3.6
NetC10_2: C10.2 R11.1 R12.1 R13.1 R14.1
NetC12_1: C12.1 U3.5 X1.1
NetC14_1: C14.1 U6.4 | length 160
  Top Layer w39.37: C14.1 U6.4
NetC41_1: C41.1 R46.2
NetC42_1: C42.1 R47.1 X41.1
NetC43_1: C43.1 R48.1 X41.2
NetC48_1: C48.1 CB46.1 U42.71
NetC64_1: C64.1 C65.1 C66.1 C67.1 C68.1 C69.1 C70.1 C71.1 CN42.1 D41.6 R43.1 R56.1 R60.1 W2.1 | length 182.4
  Top Layer w15.75: C70.1 C71.1 8953.88,3412.38 8953.88,3357.62 C68.1 C69.1
NetCB41_1: CB41.1 CB42.1 R41.2
NetCB44_2: CB44.2 CB45.2 U42.30
NetCB47_1: CB47.1 CB48.1 U42.143
NetCB49_1: CB49.1 U42.38
NetCN41_1: CN41.1 R53.2
NetCN41_2: CN41.2 R50.1 R54.1
NetCN41_4: CN41.4 R52.1 R55.1
NetJP41_2: JP41.2 R16.2
NetJP42_1: JP42.1 U3.18
NetJP43_1: JP43.1 R56.2 R58.1
NetLD1_1: LD1.1 R28.1
NetLD41_1: LD41.1 R42.2
NetLD42_1: LD42.1 R44.2
NetLD43_1: LD43.1 R59.1
NetLD43_2: LD43.2 T41.3
NetP1_U_DCI_TCAN_1_1: P1_U_DCI_TCAN_1.1 U4_U_DCI_TCAN_1.8 | length 230.8
  Top Layer w9.84: U4_U_DCI_TCAN_1.8 P1_U_DCI_TCAN_1.1
NetP1_U_DCI_TCAN_1_4: P1_U_DCI_TCAN_1.4 U4_U_DCI_TCAN_1.5 | length 230.8
  Top Layer w9.84: U4_U_DCI_TCAN_1.5 P1_U_DCI_TCAN_1.4
NetP1_U_DCI_TCAN_2_1: P1_U_DCI_TCAN_2.1 U4_U_DCI_TCAN_2.8 | length 247.9
  Top Layer w15: U4_U_DCI_TCAN_2.8 3490,3415 P1_U_DCI_TCAN_2.1
NetP1_U_DCI_TCAN_2_4: P1_U_DCI_TCAN_2.4 U4_U_DCI_TCAN_2.5 | length 247.9
  Top Layer w9.84: U4_U_DCI_TCAN_2.5 3251.71,3117.5 3492.5,3117.5 P1_U_DCI_TCAN_2.4
NetP2_1: P2.1 R24.2
NetP2_2: P2.2 R26.2
NetR3_2: R3.2 R8.1 U3.8
NetR4_2: R4.2 R9.1 U3.7
NetR5_2: R5.2 R16.1 U3.11
NetR10_1: R10.1 U3.10
NetR11_2: R11.2 U2.10
NetR12_2: R12.2 U2.15
NetR15_1: R15.1 U3.24
NetR19_1: R19.1 U3.14
NetR23_U_DCI_TCAN_1_1: R23_U_DCI_TCAN_1.1 W1_U_DCI_TCAN_1.1 | length 127
  Top Layer w9.84: R23_U_DCI_TCAN_1.1 W1_U_DCI_TCAN_1.1
NetR23_U_DCI_TCAN_2_1: R23_U_DCI_TCAN_2.1 W1_U_DCI_TCAN_2.1
NetR24_1: R24.1 R25.2 U5.3
NetR26_1: R26.1 R27.2 U5.5
NetR60_2: R60.2 R61.2 T41.1
NRST: B42.2 B42.3 C46.2 CN41.5 U3.15 U42.25
PA0: R45.2 U42.7 U42.34
PA1: R19.2 U42.35
PA2: R17.1 U3.12 U42.36
PA3: U42.37
PA4: U42.40
PA5: U42.41
PA6: U42.42
PA7: JP41.1 U42.43
PA8: TP41.1 U42.100
PA9: R43.2 U42.101
PA10: CN42.4 D41.1 U42.102
PA13: R54.2 U42.105
PA14: CN41.3 R51.1 U42.109
PA15: U42.110
PB0: U42.46
PB1: U42.47
PB2: R41.1 U42.48
PB3: R55.2 U42.133
PB4: U42.134
PB5: U42.135
PB6: U42.136
PB7: R42.1 U42.137
PB8: U42.139
PB9: U42.140
PB10: U42.69
PB11: U42.70
PB12: U42.73
PB13: JP42.2 U42.74
PB14: R44.1 U42.75
PB15: U42.76
PC0: U42.26
PC1: U3.13 U42.27
PC2: U42.28
PC3: U42.29
PC4: R8.2 U42.44
PC5: R9.2 U42.45
PC6: U42.96
PC7: U42.97
PC8: U42.98
PC9: U42.99
PC10: U42.111
PC11: U42.112
PC12: U4_U_DCI_TCAN_2.3 U42.113
PC14: R48.2 U42.8
PC15: R47.2 U42.9
PD0: U42.114
PD1: U42.115
PD2: U4_U_DCI_TCAN_2.2 U42.116
PD3: U42.117
PD4: U42.118
PD5: U42.119
PD6: U42.122
PD7: U42.123
PD8: U42.77
PD9: U42.78
PD10: U42.79
PD11: U42.80
PD12: U42.81
PD13: U42.82
PD14: U42.85
PD15: U42.86
PE0: U42.141
PE1: U42.142
PE2: U41.6 U42.1 U43.8
PE3: U41.1 U42.2
PE4: U41.3 U42.3
PE5: U41.2 U42.4 U43.10
PE6: U41.5 U42.5 U43.9
PE7: U41.7 U42.58
PE8: U42.59 U43.7
PE9: U42.60 U43.14
PE10: U42.63 U43.16
PE11: U42.64 U43.15
PE12: U42.65 U43.11
PE13: U42.66 U43.12
PE14: U42.67 U43.13
PE15: U42.68
PF0: U42.10
PF1: U42.11
PF2: U42.12
PF3: U42.13
PF4: U5.1 U5.2 U42.14
PF5: U5.6 U5.7 U42.15 | length 50
  Top Layer w15.75: U5.6 U5.7
PF6: U4_U_DCI_TCAN_1.2 U42.18
PF7: U4_U_DCI_TCAN_1.3 U42.19
PF8: U42.20
PF9: U42.21
PF10: U42.22
PF11: U42.49
PF12: U42.50
PF13: U42.53
PF14: U42.54
PF15: U42.55
PG0: U42.56
PG1: U42.57
PG2: U42.87
PG3: U42.88
PG4: U42.89
PG5: U42.90
PG6: R57.2 U42.91
PG7: JP43.2 U42.92
PG8: U42.93
PG9: U42.124
PG10: U42.125
PG11: U3.16 U42.126
PG12: U42.127
PG13: U3.17 U42.128
PG14: U42.129
PG15: U42.132
PH0: C44.1 U42.23 X42.2
PH1: C45.1 U42.24 X42.1
PWR_JACK: J2.1 W3.1 W4.1
PX0: P41.1 U43.17
PX1: P41.2 U43.18
PX2: P41.3 U43.19
PX3: P41.4 U43.20
PX4: P41.5 U43.21
PX5: P41.6 U43.22
PX6: P41.7 U43.23
PX7: P41.8 U43.24
PX8: P41.9 U43.25
PX9: P41.10 U43.26
PX10: P41.11 U43.27
PX11: P41.12 U43.28
PX12: P41.13 U43.1
PX13: P41.14 U43.2
PX14: P41.15 U43.3
PX15: P41.16 U43.4
RD_N: R1.1 U1.6 U2.8 U3.22
RD_P: R6.1 U1.1 U2.6 U3.23
RX+: J1.5 U2.11
RX-: J1.7 U2.9
SHIELD: C10.1 J1.S1 J1.S2 SB1.1 SB2.1
TD_N: R2.1 U1.4 U2.3 U3.20
TD_P: R7.1 U1.3 U2.1 U3.21
TX+: J1.1 U2.16
TX-: J1.3 U2.14
USB_D_N: CN42.2 D41.4 U42.103
USB_D_P: CN42.3 D41.3 R57.1 U42.104
VBAT: C49.1 CB43.2 U42.6
VDD: B41.2 B41.3 C6.2 C17.1 C19.2 C47.1 C51.1 C52.1 C53.1 C54.1 C55.1 C56.1 C57.1 C58.1 C59.1 C60.1 C61.1 C62.1 C63.1 CB41.2 CB43.1 CB44.1 CB47.2 L1.2 L2.1 L41.1 R3.1 R4.1 R5.1 R17.2 R18.1 R46.1 R50.2 R51.2 R52.2 R53.1 R59.2 U3.9 U4_U_DCI_TCAN_1.1 U4_U_DCI_TCAN_2.1 U7.4 U41.8 U42.17 U42.39 U42.52 U42.62 U42.72 U42.84 U42.95 U42.106 U42.108 U42.121 U42.131 U42.144 U43.5 | length 340.1
  Top Layer w9.84: v1(1985,3415) U4_U_DCI_TCAN_1.1 ; v1(2820,3415) U4_U_DCI_TCAN_2.1
  Top Layer w15.75: L2.1 v1(1430,3305) ; U7.4 4557.17,3152.6 4588.19,3121.58 4588.19,3121.34 4598.03,3111.5 C19.2 C17.1
pads on no net: J1.MH1 J1.MH2 J2.MH1 J2.MH2 U2.4 U2.5 U2.12 U2.13 U7.3 U7.5

## Polygon pours and split planes (outlines as drawn)
NetC64_1 on Top Layer "NETC64_1" (solid, pour order 0): 9265,3445 9240,3470 9065,3470 9050,3455 8925,3455 8900,3430 8900,3330 8920,3310 9055,3310 9070,3295 9240,3295 9265,3320
no net on GND (split plane): 6039.9,20.1 20.1,20.1 20.1,3984.9 6039.9,3984.9
no net on VDD (split plane): 6039.9,20.1 20.1,20.1 20.1,3984.9 6039.9,3984.9

## Text inside footprints (layer, text, board x,y; h text height)
CN42: Mechanical 1 "Board edge" at 6014.59,2430 h7.87 r90
P41: Top Overlay "2" at 6580,810 h50 r90; Top Overlay "1" at 6680,810 h50 r90; Top Overlay "15" at 6680,1670 h50 r90; Top Overlay "16" at 6580,1670 h50 r90